# Altium PCB 002_BMS_PANEL.PcbDoc
Units mm, origin at the board's own origin, x right, y up, seen from the top; angles counter-clockwise.
Board outline 179.73 x 222.37 mm, 2 copper layers (Top Layer, Bottom Layer); 8 components, 0 nets, 155 pads, 0 vias.
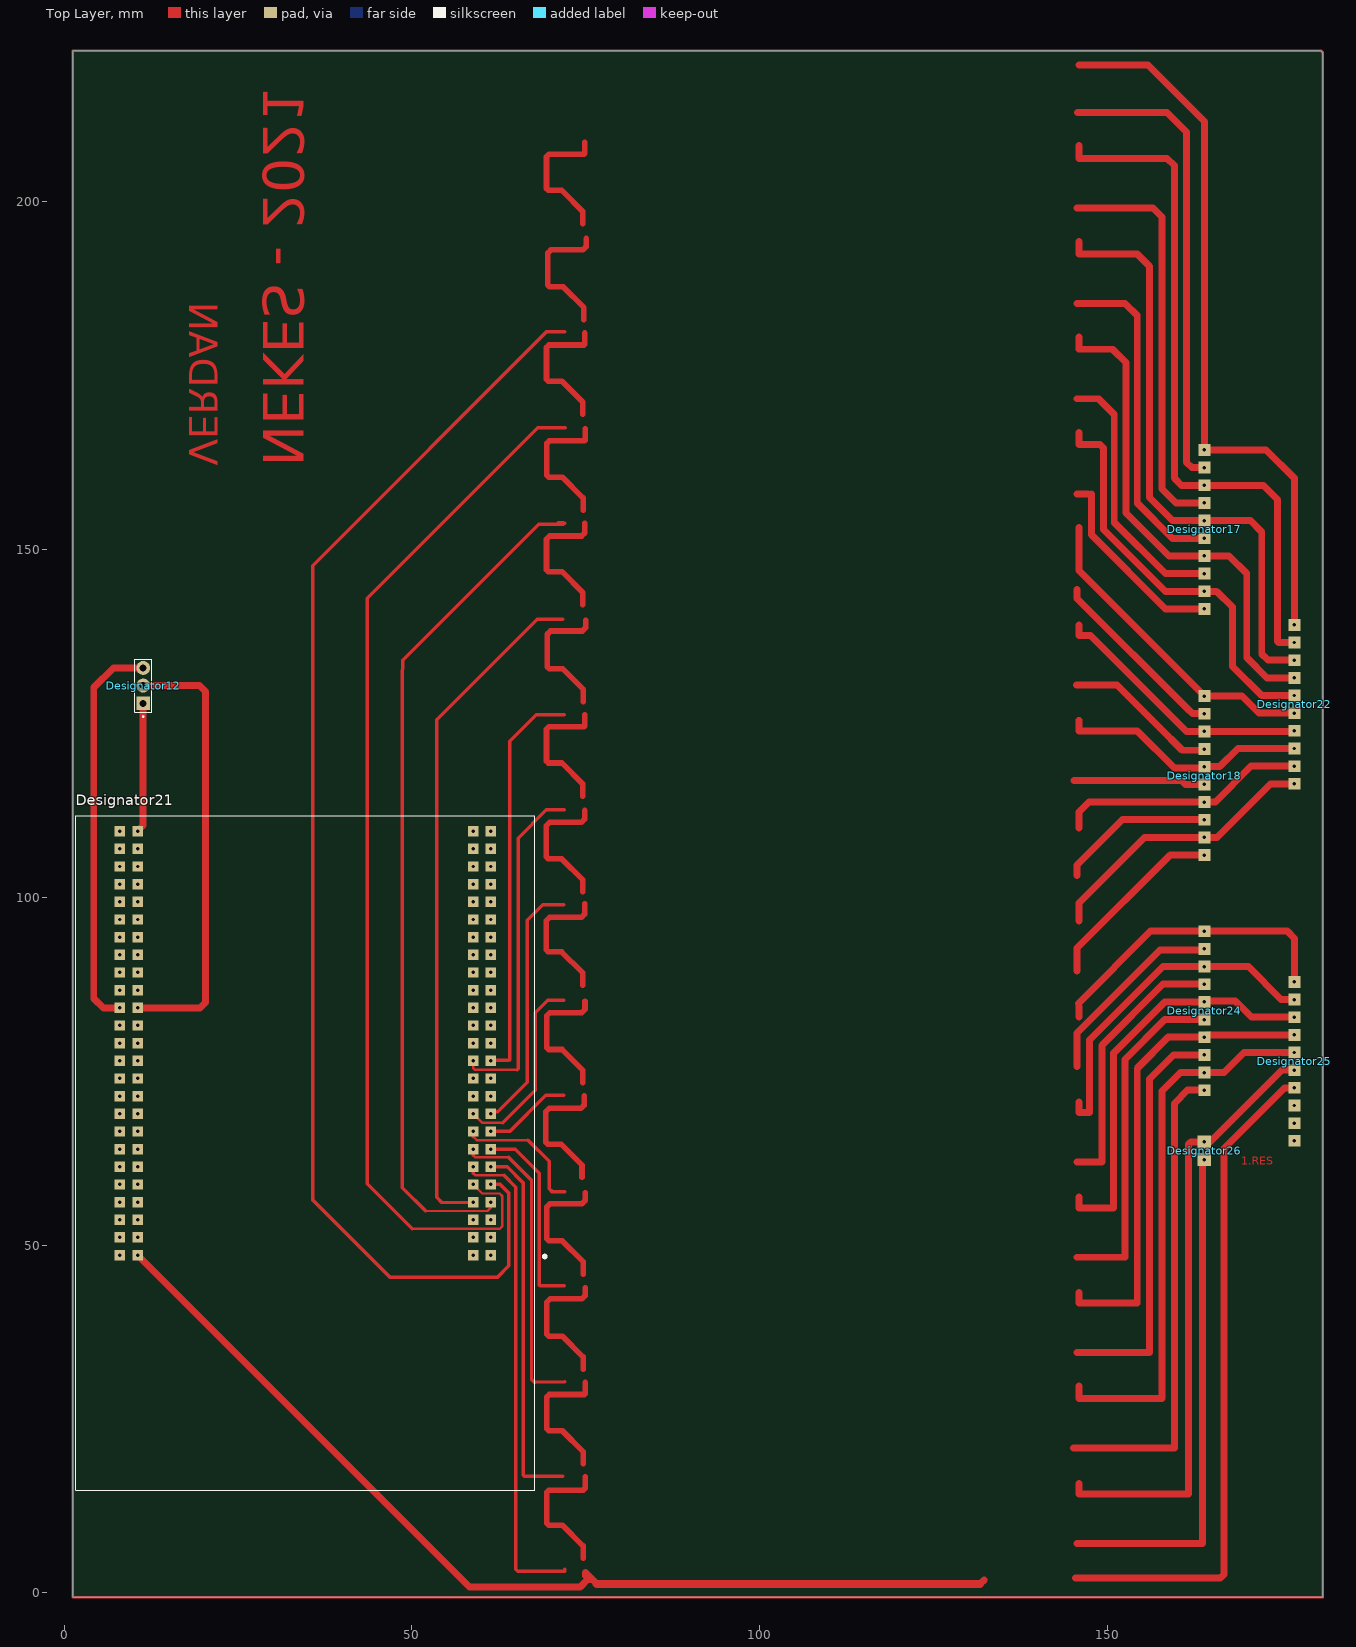
[diagram p0: Top Layer view]
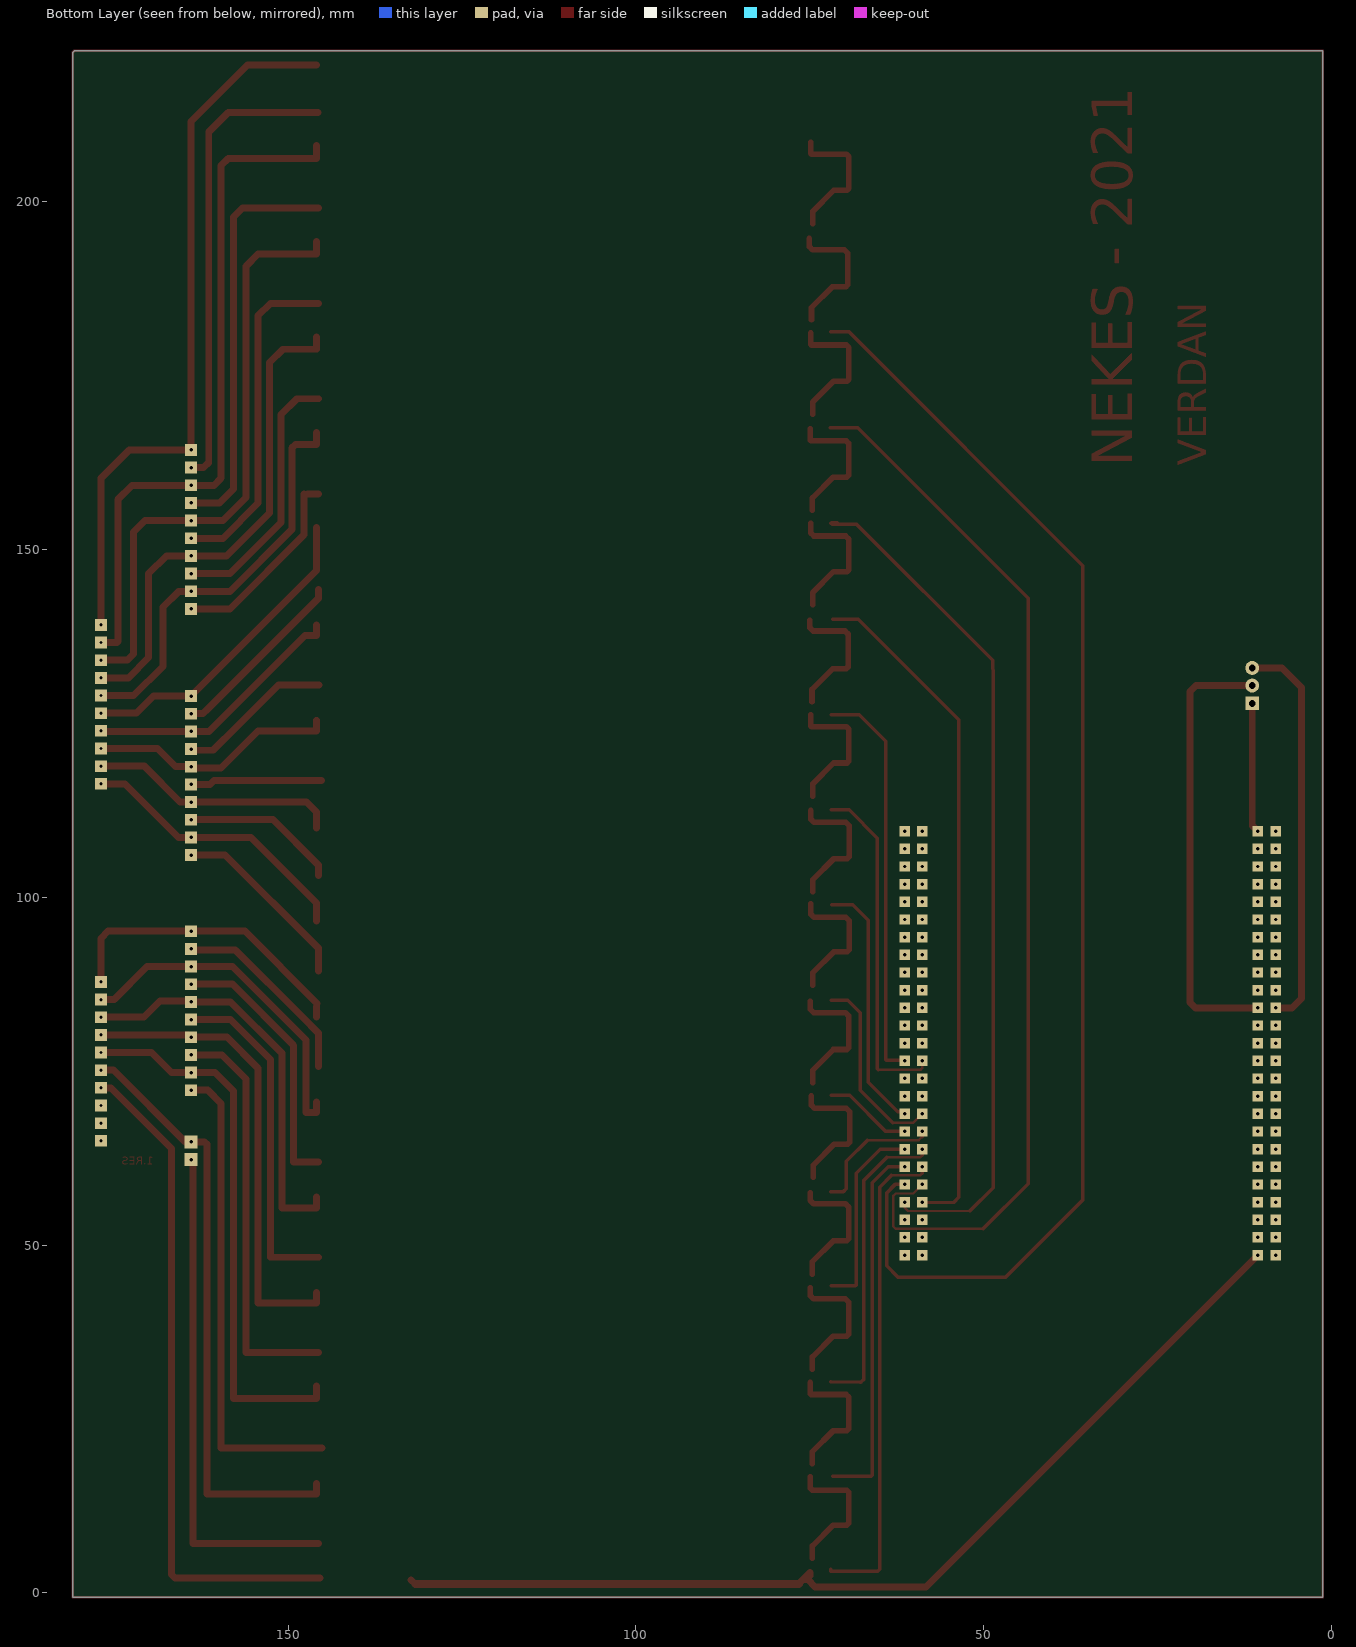
[diagram p1: Bottom Layer view, seen from below]

## Layer stack, top to bottom
Top Solder: solder mask 0.0102, Solder Resist, Dk 3.5
Top Layer: signal copper 0.0356
Dielectric 1: dielectric 0.32, FR-4, Dk 4.8
Bottom Layer: signal copper 0.0356
Bottom Solder: solder mask 0.0102, Solder Resist, Dk 3.5

## Board outline
1.245,221.59 1.245,221.742 180.741,221.742 180.975,221.508 180.975,-0.629 1.245,-0.629 1.245,29.489

## Design rules (kind name [scope] priority, off if disabled: settings)
Clearance [All] p1: gap=0.254 ignorepadtopadclearanceinfootprint=FALSE except(0: Arc-Hole Track-Hole SMDPad-Hole THPad-Hole Via-Hole Fill-Hole Poly-Hole Region-Hole Text-Hole)
PolygonConnect [All] p1: connectstyle=Relief reliefconductorwidth=0.254 reliefentries=4 polygonreliefangle="90 Angle" airgapwidth=0.254
RoutingVias [All] p1: holewidth=0.711 width=1.27 viastyle="Through Hole" minholewidth=0.711 minwidth=1.27 maxholewidth=0.711 maxwidth=1.27
SolderMaskExpansion [All] p1: expansion=0.102 istentingtop=FALSE
Width [All] p1: maxlimit=0.254 minlimit=0.254 preferedwidth=0.254
30 further rules are at their usual default settings.

## Components (designator, comment, footprint, x,y, rotation, side; value= is the part's Value field where it differs from the comment)
Designator12 "Comment" TE_826926-3 11.379,127.914 r90 top
Designator17 "Comment" "10XHEADER1 - DUPLICATE" 163.957,141.478 r90 top
Designator18 "Comment" "10XHEADER1 - DUPLICATE" 163.957,106.096 r90 top
Designator21 "Comment" STM32F4DISCOVERY 34.696,63.246 r180 top
Designator22 "Comment" "10XHEADER1 - DUPLICATE" 176.911,116.332 r90 top
Designator24 "Comment" "10XHEADER1 - DUPLICATE" 163.957,72.28 r90 top
Designator25 "Comment" "10XHEADER1 - DUPLICATE" 176.911,65 r90 top
Designator26 "Comment" 2XHEADER1 163.957,62.31 r90 top

## Footprints (in the part's own frame and the unit in brackets; to place one, negate y for a bottom-side part, rotate by r counter-clockwise, add the part's x,y. Pads: shape width x height; smd on the part's side, far side on the other; paste and mask are expansions set on the pad)
2XHEADER1 [mm]
  rect 1.9x1.9 hole 0.5: 1(0,0) 2(2.54,0)
"10XHEADER1 - DUPLICATE" [mm]
  rect 1.7x1.7 hole 0.5: 1(0,0) 2(2.54,0) 3(5.08,0) 4(7.62,0) 5(10.16,0) 6(12.7,0) 7(15.24,0) 8(17.78,0) 9(20.32,0) 10(22.86,0)
STM32F4DISCOVERY [mm]
  rect 1.5x1.5 hole 0.5: P1_1(-26.67,14.68) P1_2(-24.13,14.68) P1_3(-26.67,12.14) P1_4(-24.13,12.14) P1_5(-26.67,9.6) P1_6(-24.13,9.6) P1_7(-26.67,7.06) P1_8(-24.13,7.06) P1_9(-26.67,4.52) P1_10(-24.13,4.52) P1_11(-26.67,1.98) P1_12(-24.13,1.98) P1_13(-26.67,-0.56) P1_14(-24.13,-0.56) P1_15(-26.67,-3.1) P1_16(-24.13,-3.1) P1_17(-26.67,-5.64) P1_18(-24.13,-5.64) P1_19(-26.67,-8.18) P1_20(-24.13,-8.18) P1_21(-26.67,-10.72) P1_22(-24.13,-10.72) P1_23(-26.67,-13.26) P1_24(-24.13,-13.26) P1_25(-26.67,-15.8) P1_26(-24.13,-15.8) P1_27(-26.67,-18.34) P1_28(-24.13,-18.34) P1_29(-26.67,-20.88) P1_30(-24.13,-20.88) P1_31(-26.67,-23.42) P1_32(-24.13,-23.42) P1_33(-26.67,-25.96) P1_34(-24.13,-25.96) P1_35(-26.67,-28.5) P1_36(-24.13,-28.5) P1_37(-26.67,-31.04) P1_38(-24.13,-31.04) P1_39(-26.67,-33.58) P1_40(-24.13,-33.58) P1_41(-26.67,-36.12) P1_42(-24.13,-36.12) P1_43(-26.67,-38.66) P1_44(-24.13,-38.66) P1_45(-26.67,-41.2) P1_46(-24.13,-41.2) P1_47(-26.67,-43.74) P1_48(-24.13,-43.74) P1_49(-26.67,-46.28) P1_50(-24.13,-46.28) P2_1(24.13,14.68) P2_2(26.67,14.68) P2_3(24.13,12.14) P2_4(26.67,12.14) P2_5(24.13,9.6) P2_6(26.67,9.6) P2_7(24.13,7.06) P2_8(26.67,7.06) P2_9(24.13,4.52) P2_10(26.67,4.52) P2_11(24.13,1.98) P2_12(26.67,1.98) P2_13(24.13,-0.56) P2_14(26.67,-0.56) P2_15(24.13,-3.1) P2_16(26.67,-3.1) P2_17(24.13,-5.64) P2_18(26.67,-5.64) P2_19(24.13,-8.18) P2_20(26.67,-8.18) P2_21(24.13,-10.72) P2_22(26.67,-10.72) P2_23(24.13,-13.26) P2_24(26.67,-13.26) P2_25(24.13,-15.8) P2_26(26.67,-15.8) P2_27(24.13,-18.34) P2_28(26.67,-18.34) P2_29(24.13,-20.88) P2_30(26.67,-20.88) P2_31(24.13,-23.42) P2_32(26.67,-23.42) P2_33(24.13,-25.96) P2_34(26.67,-25.96) P2_35(24.13,-28.5) P2_36(26.67,-28.5) P2_37(24.13,-31.04) P2_38(26.67,-31.04) P2_39(24.13,-33.58) P2_40(26.67,-33.58) P2_41(24.13,-36.12) P2_42(26.67,-36.12) P2_43(24.13,-38.66) P2_44(26.67,-38.66) P2_45(24.13,-41.2) P2_46(26.67,-41.2) P2_47(24.13,-43.74) P2_48(26.67,-43.74) P2_49(24.13,-46.28) P2_50(26.67,-46.28)
  silkscreen extent -34.61,-48.5 33,48.5
TE_826926-3 [mm]
  rect 2x2 hole 1: 1(0,0)
  round 2 hole 1: 2(2.54,0) 3(5.08,0)
  silkscreen extent -2.02,-1.25 6.35,1.25

## Nets (pads, with @x,y where several pads share a name; then routed paths per layer and width w, separated by ;. In a path a pad name is that pad's centre, name@x,y a point inside that pad or via, vN(x,y) a via of type N, cw(c..) or ccw(c..) an arc to the next point about the centre after c; other vN are vias at no path point)
pads on no net: Designator12.1 Designator12.2 Designator12.3 Designator17.1 Designator17.2 Designator17.3 Designator17.4 Designator17.5 Designator17.6 Designator17.7 Designator17.8 Designator17.9 Designator17.10 Designator18.1 Designator18.2 Designator18.3 Designator18.4 Designator18.5 Designator18.6 Designator18.7 Designator18.8 Designator18.9 Designator18.10 Designator21.P1_1 Designator21.P1_2 Designator21.P1_3 Designator21.P1_4 Designator21.P1_5 Designator21.P1_6 Designator21.P1_7 Designator21.P1_8 Designator21.P1_9 Designator21.P1_10 Designator21.P1_11 Designator21.P1_12 Designator21.P1_13 Designator21.P1_14 Designator21.P1_15 Designator21.P1_16 Designator21.P1_17 Designator21.P1_18 Designator21.P1_19 Designator21.P1_20 Designator21.P1_21 Designator21.P1_22 Designator21.P1_23 Designator21.P1_24 Designator21.P1_25 Designator21.P1_26 Designator21.P1_27 Designator21.P1_28 Designator21.P1_29 Designator21.P1_30 Designator21.P1_31 Designator21.P1_32 Designator21.P1_33 Designator21.P1_34 Designator21.P1_35 Designator21.P1_36 Designator21.P1_37 Designator21.P1_38 Designator21.P1_39 Designator21.P1_40 Designator21.P1_41 Designator21.P1_42 Designator21.P1_43 Designator21.P1_44 Designator21.P1_45 Designator21.P1_46 Designator21.P1_47 Designator21.P1_48 Designator21.P1_49 Designator21.P1_50 Designator21.P2_1 Designator21.P2_2 Designator21.P2_3 Designator21.P2_4 Designator21.P2_5 Designator21.P2_6 Designator21.P2_7 Designator21.P2_8 Designator21.P2_9 Designator21.P2_10 Designator21.P2_11 Designator21.P2_12 Designator21.P2_13 Designator21.P2_14 Designator21.P2_15 Designator21.P2_16 Designator21.P2_17 Designator21.P2_18 Designator21.P2_19 Designator21.P2_20 Designator21.P2_21 Designator21.P2_22 Designator21.P2_23 Designator21.P2_24 Designator21.P2_25 Designator21.P2_26 Designator21.P2_27 Designator21.P2_28 Designator21.P2_29 Designator21.P2_30 Designator21.P2_31 Designator21.P2_32 Designator21.P2_33 Designator21.P2_34 Designator21.P2_35 Designator21.P2_36 Designator21.P2_37 Designator21.P2_38 Designator21.P2_39 Designator21.P2_40 Designator21.P2_41 Designator21.P2_42 Designator21.P2_43 Designator21.P2_44 Designator21.P2_45 Designator21.P2_46 Designator21.P2_47 Designator21.P2_48 Designator21.P2_49 Designator21.P2_50 Designator22.1 Designator22.2 Designator22.3 Designator22.4 Designator22.5 Designator22.6 Designator22.7 Designator22.8 Designator22.9 Designator22.10 Designator24.1 Designator24.2 Designator24.3 Designator24.4 Designator24.5 Designator24.6 Designator24.7 Designator24.8 Designator24.9 Designator24.10 Designator25.1 Designator25.2 Designator25.3 Designator25.4 Designator25.5 Designator25.6 Designator25.7 Designator25.8 Designator25.9 Designator25.10 Designator26.1 Designator26.2
copper on no net: | length 4135.8
  Top Layer w0.2: 10.566,127.102 11.379,127.914
  Top Layer w0.35: 50.089,52.349 62.662,52.349 62.992,52.68 62.992,57.074 62.636,57.429 60.123,57.429 58.826,58.726 ; 51.994,54.915 60.858,54.915 61.366,55.423 61.366,56.186 ; 58.826,60.35 59.157,60.02 63.28,60.02 ; 58.826,62.941 59.157,62.611 63.932,62.611 ; 58.826,65.608 59.334,65.1 66.7,65.1 ; 58.826,68.886 60.098,67.615 63.068,67.615 ; 58.826,76.506 58.826,75.463 59.055,75.235 60.098,75.235 65.161,75.235
  Top Layer w0.4: 1.245,-0.629 1.245,29.489 1.245,221.59 1.245,221.742 3.658,221.742 180.741,221.742 180.975,221.508 180.975,-0.629 1.245,-0.629
  Top Layer w0.5: 50.089,52.349 43.586,58.852 43.586,143.002 68.123,167.538 72.06,167.538 ; 51.994,54.915 48.641,58.268 48.641,131.445 48.711,134.081 68.275,153.645 71.044,153.645 71.78,153.645 71.958,153.822 ; 58.774,56.134 54.305,56.134 53.569,56.871 53.569,125.552 68.021,140.005 71.73,140.005 ; 58.826,60.35 58.826,61.266 ; 58.826,62.941 58.826,63.806 ; 58.826,65.608 58.826,66.346 ; 61.366,58.726 62.737,58.726 63.957,57.506 63.957,47.015 62.357,45.415 46.812,45.415 35.738,56.49 35.738,147.701 69.342,181.305 72.009,181.305 ; 61.366,61.266 63.702,61.266 65.989,58.979 65.989,31.624 65.989,30.328 65.989,18.656 ; 61.366,63.806 64.869,63.806 68.326,60.349 68.326,44.262 68.443,44.145 71.907,44.145 ; 61.366,66.346 64.085,66.346 69.266,71.526 71.882,71.526 ; 61.366,68.886 61.688,69.207 62.349,69.207 66.573,73.431 66.573,96.698 68.809,98.933 71.831,98.933 ; 61.416,76.556 63.967,76.556 64.084,76.673 64.084,122.453 67.869,126.238 71.933,126.238 ; 63.068,67.615 67.742,72.288 67.742,83.439 69.52,85.217 71.882,85.217 ; 63.28,60.02 64.948,58.352 64.948,30.583 64.948,30.328 64.948,17.615 64.948,16.815 64.948,3.404 65.24,3.111 72.009,3.111 72.009,3.429 ; 63.932,62.611 67.208,59.334 67.208,32.843 67.208,30.706 67.573,30.341 67.632,30.282 67.717,30.282 71.958,30.328 ; 65.161,75.235 65.278,75.352 65.278,108.534 69.342,112.598 71.907,112.598 ; 65.989,16.967 65.989,18.669 ; 66.04,16.916 66.142,16.815 ; 66.167,16.789 71.73,16.789 ; 66.7,65.1 69.748,62.052 69.748,59.512 69.748,58.115 70.155,57.709 72.009,57.709 ; 71.044,153.848 71.806,153.848
  Top Layer w0.8: 74.473,59.741 74.473,61.519 71.476,64.516 69.545,64.516 69.266,64.795 69.266,69.204 69.734,69.672 74.309,69.672 74.778,70.141 74.778,71.45 ; 74.549,87.401 74.549,89.179 71.552,92.177 69.621,92.177 69.342,92.456 69.342,96.661 69.811,97.13 74.385,97.13 74.854,97.598 74.854,99.111 ; 74.549,100.787 74.549,102.565 71.552,105.562 69.621,105.562 69.342,105.842 69.342,110.326 69.811,110.795 74.385,110.795 74.854,111.263 74.854,112.497 ; 74.574,114.554 74.574,116.332 71.577,119.329 69.647,119.329 69.367,119.609 69.367,124.181 69.723,124.536 74.752,124.536 74.879,124.663 74.879,126.263 ; 74.574,142.062 74.574,143.84 71.577,146.837 69.647,146.837 69.367,147.117 69.367,151.5 69.836,151.968 74.411,151.968 74.879,152.437 74.879,153.772 ; 74.574,169.443 74.574,171.221 71.577,174.219 69.647,174.219 69.367,174.498 69.367,179.07 69.723,179.426 74.752,179.426 74.879,179.553 74.879,181.153 ; 74.574,196.875 74.574,198.653 71.577,201.651 69.647,201.651 69.367,201.93 69.367,206.502 69.723,206.858 74.752,206.858 74.879,206.985 74.879,208.585 ; 74.6,73.355 74.6,75.133 71.603,78.13 69.672,78.13 69.393,78.41 69.393,82.97 69.861,83.439 74.436,83.439 74.905,83.908 74.905,85.065 ; 74.625,4.978 74.625,6.756 71.628,9.754 69.698,9.754 69.418,10.033 69.418,14.49 69.711,14.783 74.637,14.783 74.93,15.076 74.93,16.688 ; 74.625,18.542 74.625,20.32 71.628,23.317 69.698,23.317 69.418,23.597 69.418,28.169 69.774,28.524 74.803,28.524 74.93,28.651 74.93,30.251 ; 74.625,32.156 74.625,33.934 71.628,36.932 69.698,36.932 69.418,37.211 69.418,41.797 69.887,42.266 74.461,42.266 74.93,42.734 74.93,43.866 ; 74.625,45.847 74.625,47.625 71.628,50.622 69.698,50.622 69.418,50.902 69.418,55.488 69.887,55.956 74.461,55.956 74.93,56.425 74.93,57.556 ; 74.625,155.651 74.625,157.429 71.628,160.426 69.698,160.426 69.418,160.706 69.418,165.278 69.774,165.633 74.803,165.633 74.93,165.76 74.93,167.361 ; 74.676,128.118 74.676,129.896 71.679,132.893 69.748,132.893 69.469,133.172 69.469,137.834 69.938,138.303 74.512,138.303 74.981,138.772 74.981,139.827 ; 74.752,183.032 74.752,184.81 71.755,187.808 69.825,187.808 69.545,188.087 69.545,192.648 70.014,193.116 74.588,193.116 75.057,193.585 75.057,194.742
  Top Layer w1: 8.026,84.126 5.638,84.126 4.267,85.496 4.267,130.175 7.087,132.994 11.379,132.994 ; 10.566,48.566 58.294,0.838 74.217,0.838 75.284,1.905 75.946,1.905 ; 10.566,84.126 19.534,84.126 20.32,84.912 20.32,129.591 19.456,130.454 11.379,130.454 ; 10.566,109.526 11.379,110.339 11.379,127.914 ; 74.955,2.464 74.955,2.921 76.606,1.27 ; 131.699,1.27 132.309,1.88 ; 145.161,20.828 159.639,20.828 159.639,21.336 159.639,70.358 161.561,72.28 163.957,72.28 ; 145.237,116.84 160.655,116.84 161.239,116.256 163.957,116.256 ; 145.415,2.159 166.243,2.159 166.751,2.667 166.751,63.881 175.49,72.62 176.911,72.62 ; 145.542,130.556 151.384,130.556 157.353,124.587 160.782,121.158 163.957,121.158 ; 145.669,7.112 147.955,7.112 163.703,7.112 163.703,61.988 ; 145.669,34.544 156.083,34.544 156.083,73.914 159.529,77.36 163.957,77.36 ; 145.669,48.26 152.527,48.26 152.527,76.708 158.259,82.44 163.957,82.44 ; 145.669,61.976 149.225,61.976 149.225,78.74 158.005,87.52 163.957,87.52 ; 145.669,75.692 145.669,80.518 147.955,82.804 157.607,92.456 163.813,92.456 163.957,92.6 ; 145.669,89.408 145.669,92.38 145.669,92.71 159.056,106.096 163.957,106.096 ; 145.669,103.124 145.669,104.648 152.198,111.176 163.957,111.176 ; 145.669,144.272 145.669,143.002 161.544,127.127 162.255,126.416 163.957,126.416 ; 145.669,157.988 147.193,157.988 ; 145.669,171.704 148.717,171.704 151.003,169.418 151.003,153.924 158.369,146.558 163.957,146.558 ; 145.669,185.42 152.527,185.42 154.305,183.642 154.305,156.718 159.385,151.638 163.957,151.638 ; 145.669,199.136 156.337,199.136 ; 145.74,212.859 158.616,212.859 161.417,210.058 161.417,162.56 162.179,161.798 163.957,161.798 ; 145.859,84.772 156.227,95.14 163.957,95.14 175.878,95.14 176.911,94.107 176.911,87.86 ; 145.923,15.748 145.923,14.224 161.671,14.224 161.671,64.516 162.005,64.85 163.957,64.85 164.799,64.85 175.109,75.16 176.911,75.16 ; 145.923,29.718 145.923,27.94 157.861,27.94 157.861,72.136 160.545,74.82 163.957,74.82 166.768,74.82 169.648,77.7 176.911,77.7 ; 145.923,43.18 145.923,41.656 154.305,41.656 154.305,75.438 158.767,79.9 163.957,79.9 164.297,80.24 176.911,80.24 ; 145.923,56.896 145.923,55.372 150.876,55.372 150.876,77.597 158.259,84.98 163.957,84.98 ; 145.923,70.612 145.923,69.088 147.447,69.088 147.447,79.502 158.005,90.06 163.957,90.06 170.29,90.06 175.006,85.344 177.165,85.344 ; 145.923,82.804 145.923,84.328 ; 145.923,96.596 145.923,98.171 145.923,99.187 155.373,108.636 163.957,108.636 165.787,108.636 173.482,116.332 176.911,116.332 ; 145.923,109.982 145.923,112.014 145.923,112.268 147.372,113.716 163.957,113.716 165.533,113.716 170.688,118.872 176.911,118.872 ; 145.923,125.476 145.923,123.952 154.305,123.952 159.639,118.618 163.779,118.618 163.957,118.796 166.168,118.796 168.783,121.412 176.911,121.412 ; 145.923,139.192 145.923,137.668 147.574,137.668 159.004,126.238 161.366,123.876 163.906,123.876 ; 145.923,153.162 145.923,146.99 163.957,128.956 169.367,128.956 171.831,126.492 176.911,126.492 ; 145.923,166.878 145.923,165.1 148.209,165.1 148.971,165.1 149.479,164.592 149.479,152.908 158.369,144.018 163.957,144.018 ; 145.923,178.816 145.923,180.594 ; 145.923,194.31 145.923,192.532 154.305,192.532 156.083,190.754 156.083,157.48 159.385,154.178 163.957,154.178 ; 145.923,206.248 ccw(c145.911,206.26) 145.928,206.26 ; 145.923,219.71 155.829,219.71 163.957,211.582 163.957,164.338 172.847,164.338 176.911,160.274 176.911,139.192 ; 145.928,208.114 145.928,206.26 ; 146.177,178.816 150.749,178.816 152.679,176.886 152.679,155.296 158.877,149.098 163.957,149.098 ; 147.701,157.988 147.701,152.146 158.369,141.478 163.957,141.478 ; 156.591,199.136 157.861,197.866 157.861,158.75 159.893,156.718 163.957,156.718 ; 162.306,144.018 165.735,144.018 168.021,141.732 168.021,133.223 172.212,129.032 176.911,129.032 ; 162.306,154.178 170.561,154.178 172.212,152.527 172.212,135.001 173.101,134.112 176.911,134.112 ; 162.306,159.258 172.466,159.258 174.498,157.226 174.498,136.779 174.625,136.652 176.911,136.652 ; 162.56,149.098 167.513,149.098 170.053,146.558 170.053,134.493 172.974,131.572 176.911,131.572 ; 163.957,123.876 176.836,123.876 ; 163.957,159.258 160.655,159.258 159.639,160.274 159.639,205.232 158.611,206.26 145.928,206.26 ; 164.211,85.09 168.402,85.09 170.712,82.78 176.911,82.78
  Top Layer w1.2: 76.606,1.27 103.911,1.27 131.699,1.27

## Other copper
Top Layer:
  text "VERDAN" at 16.651,162.084 h7 r270
  text "NEKES - 2021" at 26.678,161.9 h10 r270
  text "1.RES" at 169.291,61.124 h2

## Panel: embedded boards
"001_BMS_SLAVE.PcbDoc" at 70.231,1.016, 16 rows x 1 columns, spacing 13.716 x 152.4, rotation 0